# Altium PCB COIL-BOOST-10A.PcbDoc (part 3 of 5)
Units mm, origin at the board's own origin, x right, y up, seen from the top; angles counter-clockwise.
Board outline 80.1 x 100.1 mm, 4 copper layers (L1, L2, L3, L4), stack 1.512 mm thick; 282 components, 151 nets, 786 pads, 740 vias.
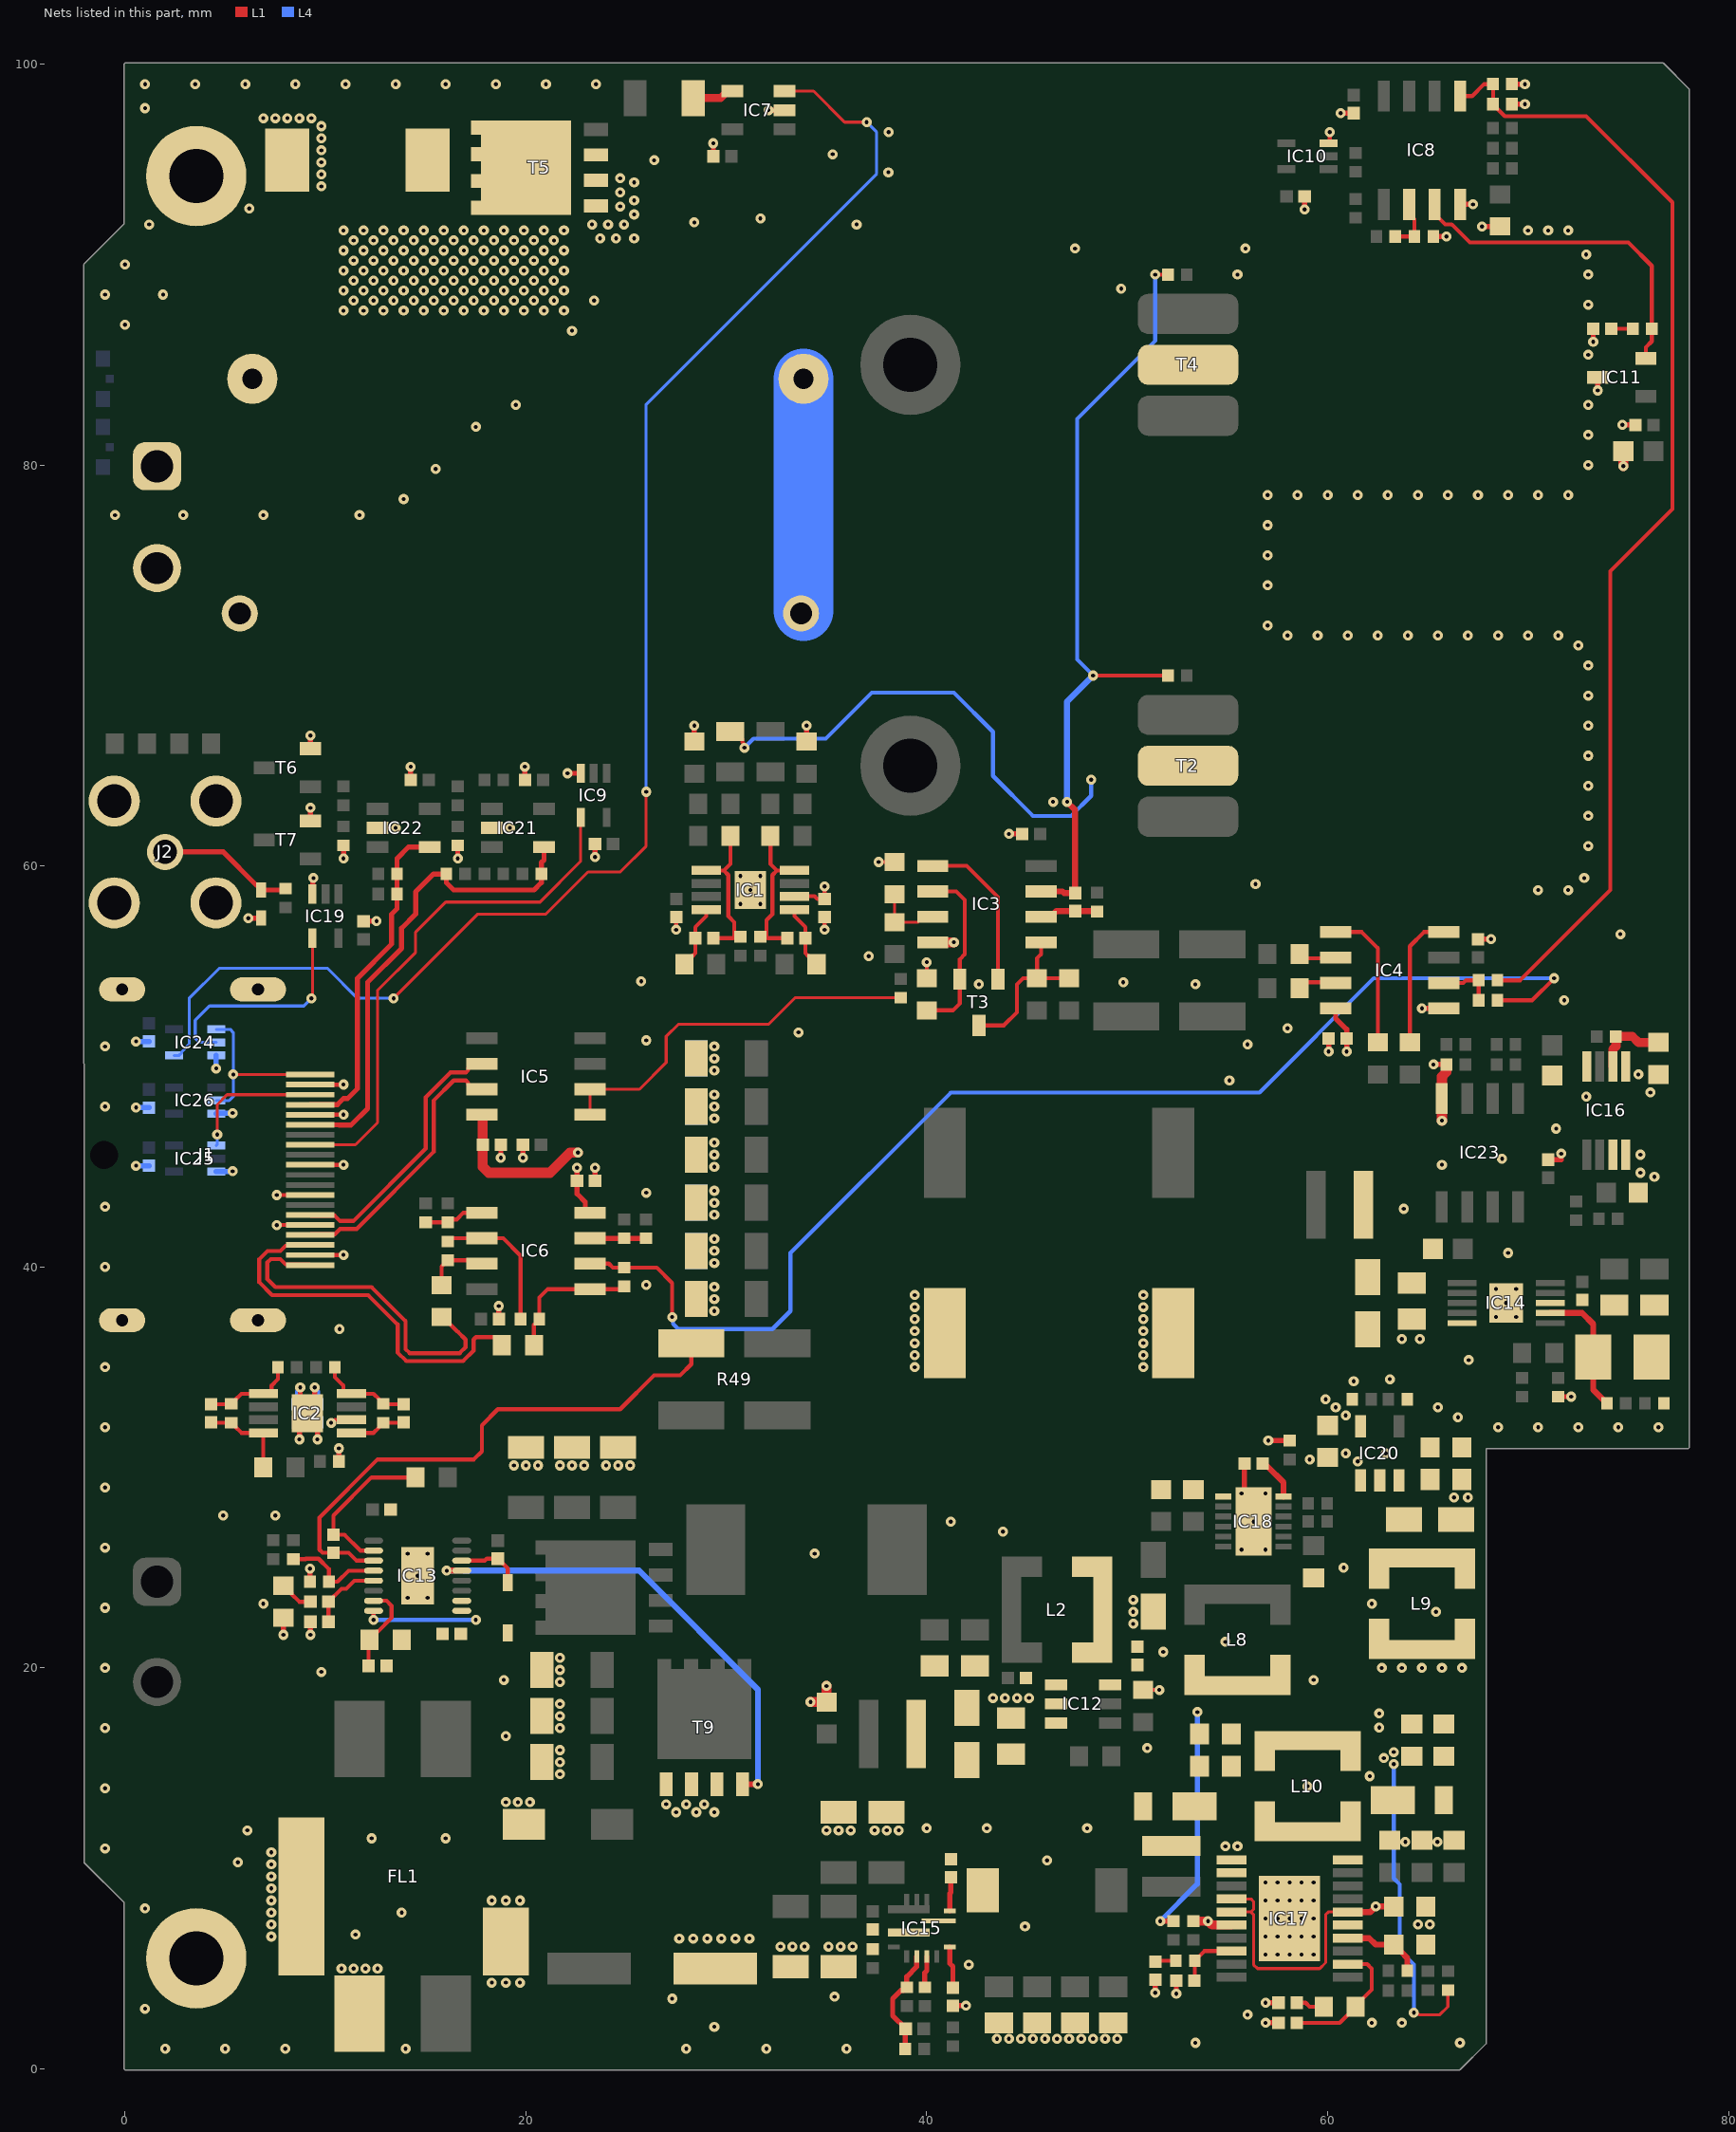
[diagram p4: the nets of this part, all layers, seen from the top]

## Part data (continued)
C78: library part CC0402_27PF_50V_5%_C0G, "Non-polarised capacitor", Case=0402, Manufacturer=GENERIC, Manufacturer1 ComponentHeight=0.55mm, Manufacturer1 Example=KEMET, Manufacturer1 Part Number=C0402C270J5GACTU, Tolerance=±5%, Voltage=50V, Author="CERN DEM JLC", Component Type=Standard, CreateDate=10/25/2012, HelpURL="\\cern.ch\dfs\Applications\Altium\Datasheets\CC0402_C0G_KEMET_(Commercial Grade).pdf", LatestRevisionDate=4/22/2015, Manufacturer Part Number=CC0402_27PF_50V_5%_C0G, Mounted=Yes, Part Description="SMD Multilayer Chip Ceramic Capacitor", Part Number=CC0402_27PF_50V_5%_C0G, Pin Count=2, Sense=No, SMD=Yes, Socket=No, Status=Preferred, TC=C0G/NP0
C79: library part CC0402_47PF_50V_5%_C0G, "Non-polarised capacitor", Case=0402, Manufacturer=GENERIC, Manufacturer1 ComponentHeight=0.55mm, Manufacturer1 Example=KEMET, Manufacturer1 Part Number=C0402C470J5GACTU, Tolerance=±5%, Voltage=50V, Author="CERN DEM JLC", Component Type=Standard, CreateDate=12/3/2007, HelpURL="\\cern.ch\dfs\Applications\Altium\Datasheets\CC0402_C0G_KEMET_(Commercial Grade).pdf", LatestRevisionDate=4/22/2015, Manufacturer Part Number=CC0402_47PF_50V_5%_C0G, Mounted=Yes, Part Description="SMD Multilayer Chip Ceramic Capacitor", Part Number=CC0402_47PF_50V_5%_C0G, Pin Count=2, Sense=No, SMD=Yes, Socket=No, Status=Preferred, TC=C0G/NP0
C80: library part CC0402_470PF_50V_10%_X7R, "Non-polarised capacitor", Case=0402, Manufacturer=GENERIC, Manufacturer1 ComponentHeight=0.55mm, Manufacturer1 Example=PHYCOMP, Manufacturer1 Part Number=223858715618, Tolerance=±10%, Voltage=50V, Author="CERN DEM JLC", Component Type=Standard, CreateDate=12/3/2007, HelpURL=\\cern.ch\dfs\Applications\Altium\Datasheets\CC0402_NP0_PHYCOMP.pdf, LatestRevisionDate=12/3/2007, Manufacturer Part Number=CC0402_470PF_50V_10%_X7R, Mounted=Yes, Part Description="SMD Multilayer Chip Ceramic Capacitor", Part Number=CC0402_470PF_50V_10%_X7R, Pin Count=2, Sense=No, SMD=Yes, Socket=No, Status="Not Recommended", TC=X7R
C81: library part CC0402_15NF_50V_5%_X7R, "Non-polarised capacitor", Case=0402, Manufacturer=GENERIC, Manufacturer1 ComponentHeight=0.55mm, Manufacturer1 Example=KEMET, Manufacturer1 Part Number=C0402C153J5RACTU, Tolerance=±5%, Voltage=50V, Author="CERN DEM BC", Component Type=Standard, CreateDate=9/2/2019, HelpURL=\\cern.ch\dfs\Applications\Altium\Datasheets\CC0402_X7R_KEMET.pdf, LatestRevisionDate=9/2/2019, Manufacturer Part Number=CC0402_15NF_50V_5%_X7R, Mounted=Yes, Part Description="SMD Multilayer Chip Ceramic Capacitor", Part Number=CC0402_15NF_50V_5%_X7R, Pin Count=2, Sense=No, SMD=Yes, Socket=No, Status=Preferred, TC=X7R
C82: library part CC0402_10NF_50V_5%_X7R, "Non-polarised capacitor", Case=0402, Manufacturer=GENERIC, Manufacturer1 ComponentHeight=0.55mm, Manufacturer1 Example=KEMET, Manufacturer1 Part Number=C0402C103J5RAC, Tolerance=±5%, Voltage=50V, Author="CERN DEM BC", Component Type=Standard, CreateDate=7/15/2020, HelpURL=\\cern.ch\dfs\Applications\Altium\Datasheets\CC0402_X7R_KEMET.pdf, LatestRevisionDate=7/15/2020, Manufacturer Part Number=CC0402_10NF_50V_5%_X7R, Mounted=Yes, Part Description="SMD Multilayer Chip Ceramic Capacitor", Part Number=CC0402_10NF_50V_5%_X7R, Pin Count=2, Sense=No, SMD=Yes, Socket=No, Status=Preferred, TC=X7R
D1: "Transient Voltage Suppressor Diode (Uni-Directional)", Case=DO-214AB, Manufacturer=LITTELFUSE, Power=1500W, Voltage=150V, Author="CERN DEM BC", Bonding=No, Component Type=Standard, ComponentHeight=2.62mm, CreateDate=11/2/2015, Device=SMCJ150A, HelpURL=\\cern.ch\dfs\Applications\Altium\Datasheets\SMCJ.pdf, LatestRevisionDate=11/2/2015, Manufacturer Part Number=SMCJ150A, Mounted=Yes, PackageDescription="DO-214-AB/SMC Molded Diode, Body 7.9x5.9mm, IPC Medium Density", Part Description="Uni-Directional Transient Voltage Suppressor Diode", Part Number=SMCJ150A, Pin Count=2, PressFit=No, Sense=No, SMD=Yes, Socket=No
D2: "Schottky Diode", Case=SOD-323, Manufacturer="ON SEMICONDUCTOR", Manufacturer Part Number=BAT54H, Power=200mA, Voltage=30V, Author="CERN DEM BC", Bonding=No, Component Type=Standard, ComponentHeight=1mm, CreateDate=9/30/2019, Device=BAT54HT1G, HelpURL=\\cern.ch\dfs\Applications\Altium\Datasheets\BAT54HT1G.pdf, LatestRevisionDate=5/24/2022, Mounted=Yes, PackageDescription="SOD-323 Diode; 1.70mm W X 1.25mm L X 1.00mm H Body, IPC Medium Density", Part Description="30V Silicon Hot-Carrier Detector and Switching Diode", Part Number=BAT54HT1G, Pin Count=2, PressFit=No, Sense=No, SMD=Yes, Socket=No
D3 D4: "Diode", Manufacturer="DIODES INCORPORATED", Power=1A, Voltage=100V, Author="CERN DEM HF", Bonding=No, Component Type=Standard, ComponentHeight=1mm, CreateDate=3/28/2024, Device=DFLS1100-7, HelpURL=\\cern.ch\dfs\Applications\Altium\Datasheets\DFLS1100-7.pdf, LatestRevisionDate=3/28/2024, Manufacturer Part Number=DFLS1100-7, Mounted=Yes, PackageDescription="SODFL Diode; 2.8mm W X 1.78mm L X mm H Body, POWERDI®123 Case", Part Description="High Voltage Schttky Barrier Rectifier", Part Number=DFLS1100-7, Pin Count=2, PressFit=No, Sense=No, SMD=Yes, Socket=No
D5: "Zener Diode", Case=DO-214AC, Manufacturer="VISHAY SEMICONDUCTORS", Power=1.25W, Voltage=27V, Author="CERN DEM JLC", Bonding=No, Component Type=Standard, ComponentHeight=2.3mm, CreateDate=6/2/2008, Device=BZG03C27, HelpURL=\\cern.ch\dfs\Applications\Altium\Datasheets\BZG03C.pdf, LatestRevisionDate=6/2/2008, Manufacturer Part Number=BZG03C27, Mounted=Yes, PackageDescription="DO-214-AC/SMA Molded Diode, Body 5.3x2.6mm, IPC Medium Density", Part Description="Voltage Regulator Diode", Part Number=BZG03C27, Pin Count=2, PressFit=No, Sense=No, SMD=Yes, Socket=No
D6: "ESD protection diode", Case=SOD523, Manufacturer="NXP SEMICONDUCTORS", Power=330W, Voltage=3V3, Author="CERN DEM JLC", Bonding=No, Component Type=Standard, ComponentHeight=0.65mm, CreateDate=11/29/2012, Device=PESD3V3S1UB, HelpURL=\\cern.ch\dfs\Applications\Altium\Datasheets\PESD3V3S1UB.pdf, LatestRevisionDate=11/29/2012, Manufacturer Part Number=PESD3V3S1UB, Mounted=Yes, PackageDescription="Ultra Small Outline Diode Flat Lead (SOD-523), Body; 1.2mm L X 0.8mm W X 0.65mm H, IPC Medium Density", Part Description="ESD protection diode (23kV)", Part Number=PESD3V3S1UB, Pin Count=2, PressFit=No, Sense=No, SMD=Yes, Socket=No
FL1: library part FIL_MURATA_BNX022-01L, "Block Type EMIFIL (LC Combined)", Manufacturer1=MURATA, Manufacturer1 Part Number=BNX022-01L, Resistance=0.5R, Author="CERN DEM JLC", Component Type=Standard, ComponentHeight=3.3mm, CreateDate=10.10.2012, HelpURL=\\cern.ch\dfs\Applications\Altium\Datasheets\FIL_MURATA_BNX022-01L.pdf, LatestRevisionDate=10.10.2012, Mounted=Yes, Part Description="Block Type EMIFIL (LC Combined) SMD Type, BNX02* Series", Part Number=FIL_MURATA_BNX022-01L, Pin Count=2, Sense=No, SMD=Yes, Socket=No, Status=None
IC1 IC2: "Differential Amplifier", Case=MSOP8, Manufacturer="TEXAS INSTRUMENTS", Author="CERN DEM JLC", Bonding=No, Component Type=Standard, ComponentHeight=1.1mm, CreateDate=12/17/2013, Device=OPA1632DGN, HelpURL=\\cern.ch\dfs\Applications\Altium\Datasheets\OPA1632DGN.pdf, LatestRevisionDate=12/17/2013, Manufacturer Part Number=OPA1632DGN, Mounted=Yes, PackageDescription="SOP, 0.65mm Pitch; 8 Pin, 3.00mm W X 3.00mm L X 1.10mm H body (w/Thermal Tab 1.57 X 1.89 mm), IPC Medium Density", Part Description="High-Performance, Fully-Differential Audio Operational Amplifier", Part Number=OPA1632DGN, Pin Count=9, PressFit=No, Sense=No, SMD=Yes, Socket=No
IC3 IC6 IC23: "Dual Operational Amplifier", Case=SOIC8, Manufacturer="TEXAS INSTRUMENTS", Author="CERN DEM MR", Bonding=No, Component Type=Standard, ComponentHeight=1.75mm, CreateDate=8/7/2019, Device=OPA2197ID, HelpURL=\\cern.ch\dfs\Applications\Altium\Datasheets\OPA2197ID.pdf, LatestRevisionDate=8/7/2019, Manufacturer Part Number=OPA2197ID, Mounted=Yes, PackageDescription="SOIC 8, Pitch 1.27mm - Body 4x5mm, IPC Medium Density", Part Description="Dual, 36-V, Precision, Rail-to-Rail Input/Output, Low Offset Voltage, Operational Amplifiers", Part Number=OPA2197ID, Pin Count=8, PressFit=No, Sense=No, SMD=Yes, Socket=No
IC4: "Low Cost Low Power Instrumentation Amplifier", Case=SOIC8, Manufacturer1="ANALOG DEVICES", Manufacturer1 Part Number=AD620ARZ-REEL7, Author="CERN DEM JLC", Bonding=No, Component Type=Standard, ComponentHeight=1.75mm, CreateDate=13.02.2017, Device=AD620ARZ, HelpURL=\\cern.ch\dfs\Applications\Altium\Datasheets\AD620ARZ.pdf, LatestRevisionDate=29.03.2022, Mounted=Yes, PackageDescription="SOIC 8, Pitch 1.27mm - Body 4x5mm, IPC Medium Density", Part Description="Low Cost Low Power Instrumentation Amplifier", Part Number=AD620ARZ, Pin Count=8, PressFit=No, Sense=No, SMD=Yes, Socket=No
IC5: "IC OPAMP DIFF 1 CIRCUIT 8SOIC Differential Amplifier 1 Circuit 8-SOIC", Case/Package=SOIC, Dual Supply Voltage=15V, Input Offset Voltage (Vos)=100µV, Manufacturer="Texas Instruments", Manufacturer Lifecycle Status=ACTIVE, Max Dual Supply Voltage=18V, Max Operating Temperature=85°C, Min Dual Supply Voltage=4V, Min Operating Temperature=-40°C, Min Supply Voltage=8V, Nominal Supply Current=2.4mA, Output Current per Channel=60mA, Supplier Part Number=INA157UA-ND, Voltage Gain=6.02dB, -3db Bandwidth=4MHz, Category="Amplifiers - Op Amps, Buffer, Instrumentation", Common Mode Rejection Ratio=80dB, ComponentLink1Description=https://sigma.octopart.com:443/49249642/technical_drawing/Texas-Instruments-INA157UA.pdf?src-supplier=Texas+Instruments, ComponentLink1URL=https://sigma.octopart.com:443/49249642/technical_drawing/Texas-Instruments-INA157UA.pdf?src-supplier=Texas+Instruments, ComponentLink2Description=https://octopart.com:443/opatz8j6/c1?t=U1EGlDNQZqLQs-EwIsscqEEx-AfnVOllSlN4p0sh4PLdG1CcVMKRtmhTNlN5f_Uh_vUGKP152rEL5GLEXC8DNZuiG5tbL9tPH-teoooIFRknLMdlw0_Jv4zBSHnT4PvLcvwFqHgDMUmN8-CU-c3UHujaNllWAgd-PDXByNTyJSuUkuVnwLSvEPkd0Q_esnRAQitWnREmUgqmclHl2b6W6tCFcyWDuRzDd4IkS-8MZ59sgpEPanuaKX1qGjiQLPbd3OG0klFAyskjpNKaHTZEnEYEGL77h_GEymF0r_g3ACZDzpib4ELj8IvhiwXeMcRieELbSgYPCbUTcjZO1RvHbL2-kGPWqPzznfkJGrgq9ClaUaTRrtnm5Mq_6ye76DY4o9A&src-supplier=Texas+Instruments, ComponentLink2URL=https://octopart.com:443/opatz8j6/c1?t=U1EGlDNQZqLQs-EwIsscqEEx-AfnVOllSlN4p0sh4PLdG1CcVMKRtmhTNlN5f_Uh_vUGKP152rEL5GLEXC8DNZuiG5tbL9tPH-teoooIFRknLMdlw0_Jv4zBSHnT4PvLcvwFqHgDMUmN8-CU-c3UHujaNllWAgd-PDXByNTyJSuUkuVnwLSvEPkd0Q_esnRAQitWnREmUgqmclHl2b6W6tCFcyWDuRzDd4IkS-8MZ59sgpEPanuaKX1qGjiQLPbd3OG0klFAyskjpNKaHTZEnEYEGL77h_GEymF0r_g3ACZDzpib4ELj8IvhiwXeMcRieELbSgYPCbUTcjZO1RvHbL2-kGPWqPzznfkJGrgq9ClaUaTRrtnm5Mq_6ye76DY4o9A&src-supplier=Texas+Instruments, ComponentLink3Description=https://datasheet.octopart.com:443/INA157UA-Texas-Instruments-datasheet-152917.pdf?src-supplier=Texas+Instruments, ComponentLink3URL=https://datasheet.octopart.com:443/INA157UA-Texas-Instruments-datasheet-152917.pdf?src-supplier=Texas+Instruments, ComponentLink4Description=https://datasheet.octopart.com:443/INA157UA-Texas-Instruments-datasheet-10257352.pdf?src-supplier=element14+APAC, ComponentLink4URL=https://datasheet.octopart.com:443/INA157UA-Texas-Instruments-datasheet-10257352.pdf?src-supplier=element14+APAC, ComponentLink5Description=https://datasheet.octopart.com:443/INA157UA-Texas-Instruments-datasheet-30905.pdf?src-supplier=DigiKey, ComponentLink5URL=https://datasheet.octopart.com:443/INA157UA-Texas-Instruments-datasheet-30905.pdf?src-supplier=DigiKey, ComponentLink6Description=https://datasheet.octopart.com:443/INA157UA-Texas-Instruments-datasheet-14140569.pdf?src-supplier=iiiC, ComponentLink6URL=https://datasheet.octopart.com:443/INA157UA-Texas-Instruments-datasheet-14140569.pdf?src-supplier=iiiC, ComponentLink7Description=https://datasheet.octopart.com:443/INA157UA-Texas-Instruments-datasheet-8443426.pdf?src-supplier=Jameco, ComponentLink7URL=https://datasheet.octopart.com:443/INA157UA-Texas-Instruments-datasheet-8443426.pdf?src-supplier=Jameco, ComponentLink8Description=http://sigma.octopart.com:80/reach_statement/Texas-Instruments-company-64.pdf?src-supplier=Compliance+Statements, ComponentLink8URL=http://sigma.octopart.com:80/reach_statement/Texas-Instruments-company-64.pdf?src-supplier=Compliance+Statements, ComponentLink9Description=http://sigma.octopart.com:80/conflict_mineral_statement/Texas-Instruments-company-63.pdf?src-supplier=Compliance+Statements, ComponentLink9URL=http://sigma.octopart.com:80/conflict_mineral_statement/Texas-Instruments-company-63.pdf?src-supplier=Compliance+Statements, Gain Bandwidth Product=3MHz, Height=1.75mm, Lead Free="Lead Free", Length=4.9mm, Lifecycle Status=Production, Manufacturer Part Number=INA157UA, Max Supply Voltage=18V, Min Input Voltage=4V, Number of Amplifiers=1, Number of Channels=2, Number of Circuits=1, Number of Elements=1, Operating Supply Current=2.4mA, Pins=8, Pricing="1=3.99, 10=3.019, 75=2.55467, 150=2.44673, 300=2.35783, 525=2.2977, 1050=2.23519, 2550=2.17103 (USD)", Quiescent Current=2.4mA, Radiation Hardening=No, REACH SVHC=No, RoHS=Compliant, Settling Time=2ns, Slew Rate=14V/µs, Stock=608, Supplier=DigiKey, Thickness=1.58mm, Weight=75.891673mg, Width=3.91mm
IC7: "Single-Channel High-Speed Low-Side Gate Driver With Negative Input  Voltage Capability", Case=SOT23-5, Manufacturer="TEXAS INSTRUMENTS", Manufacturer Part Number=UCC27519AQDBV, Author="CERN DEM JLC", Bonding=No, Component Type=Standard, ComponentHeight=1.45mm, CreateDate=7/16/2018, Device=UCC27519AQDBVRQ1, HelpURL=\\cern.ch\dfs\Applications\Altium\Datasheets\UCC27519AQDBVRQ1.pdf, LatestRevisionDate=6/13/2022, Mounted=Yes, PackageDescription="SOT, 0.95mm Pitch; 5 pin, 1.60mm W X 2.90mm L X 1.45mm H body, IPC Medium Density", Part Description="Single-Channel High-Speed Low-Side Gate Driver with Negative Input  Voltage Capability", Part Number=UCC27519AQDBVRQ1, Pin Count=5, PressFit=No, Sense=No, SMD=Yes, Socket=No
IC8: "Dual Operational Amplifier", Case=SOIC8, Manufacturer="NATIONAL SEMICONDUCTOR", Manufacturer Part Number=LM393M, Author="CERN DEM JLC", Bonding=No, Component Type=Standard, ComponentHeight=1.75mm, CreateDate=11/18/2011, Device=LM393M/NOPB, HelpURL=\\cern.ch\dfs\Applications\Altium\Datasheets\LM393M-NOPB.pdf, LatestRevisionDate=6/2/2022, Mounted=Yes, PackageDescription="SOIC 8, Pitch 1.27mm - Body 4x5mm, IPC Medium Density", Part Description="Low Power Low Offset Voltage Dual Comparators", Part Number=LM393M/NOPB, Pin Count=8, PressFit=No, Sense=No, SMD=Yes, Socket=No
IC9 IC19: "Single Schmitt-Trigger Buffer", Case=SOT353, Manufacturer="TEXAS INSTRUMENTS", Author="CERN DEM HF", Bonding=No, Component Type=Standard, ComponentHeight=1.45mm, CreateDate=05.12.2024, Device=SN74LVC1G17DCK, HelpURL=\\cern.ch\dfs\Applications\Altium\Datasheets\SN74LVC1G17.pdf, LatestRevisionDate=05.12.2024, Manufacturer Part Number=SN74LVC1G17DCK, Mounted=Yes, PackageDescription="SOT353, SC70-5, 0.65mm Pitch; 5 Pin, 1.25mm W X 2.00mm L X 1.10mm H body, IPC Medium Density", Part Description="Single Schmitt-Trigger Buffer", Part Number=SN74LVC1G17DCK, Pin Count=5, PressFit=No, Sense=No, SMD=Yes, Socket=No
IC10 IC24: "Single 2-Input Positive-OR Gate", Case=SOT353, Manufacturer="NXP SEMICONDUCTORS", Author="CERN DEM JLC", Bonding=No, Component Type=Standard, ComponentHeight=1.1mm, CreateDate=11/25/2013, Device=74LVC1G32GW, HelpURL=\\cern.ch\dfs\Applications\Altium\Datasheets\74LVC1G32GW.pdf, LatestRevisionDate=11/25/2013, Manufacturer Part Number=74LVC1G32GW, Mounted=Yes, PackageDescription="SOT353, SC70-5, 0.65mm Pitch; 5 Pin, 1.25mm W X 2.05mm L X 1.10mm H body, IPC Medium Density", Part Description="Single 2-input OR gate", Part Number=74LVC1G32GW, Pin Count=5, PressFit=No, Sense=No, SMD=Yes, Socket=No
IC11: "-20° to +100°C ±3°C Precision Centigrade Temperature Sensors", Case=SOT23, Manufacturer="TEXAS INSTRUMENTS", Author="CERN DEM JLC", Bonding=No, Component Type=Standard, ComponentHeight=1.12mm, CreateDate=19/01/2011, Device=LM45CIM3/NOPB, HelpURL=\\cern.ch\dfs\Applications\Altium\Datasheets\LM45CIM3-NOPB.pdf, LatestRevisionDate=19/01/2011, Manufacturer Part Number=LM45CIM3/NOPB, Mounted=Yes, PackageDescription="SOT, 0.95mm Pitch; 3 Pin, 1.30mm W X 2.92mm L X 1.12mm H body, IPC Medium Density", Part Description="-20° to +100°C ±3°C Precision Centigrade Temperature Sensors", Part Number=LM45CIM3/NOPB, Pin Count=3, PressFit=No, Sense=No, SMD=Yes, Socket=No
IC12: "4.2V TO 18V INPUT, 2A LOW IQ SYNCHRONOUS BUCK CONVERTER", Case=SOT23-6, Manufacturer1="DIODES INCORPORATED", Author="CERN DEM HF", Bonding=No, Component Type=Standard, ComponentHeight=1.1mm, CreateDate=07.01.2022, Device=AP62201WU-7, HelpURL=\\cern.ch\dfs\Applications\Altium\Datasheets\AP6220x.pdf, LatestRevisionDate=07.01.2022, Manufacturer1 Part Number=AP62201WU-7, Mounted=Yes, PackageDescription="SOT23, 0.95mm Pitch; 6 Pin, 1.625mm W X 2.90mm L X 1.00mm H body, IPC Medium Density", Part Description="4.2V TO 18V INPUT, 2A LOW IQ SYNCHRONOUS BUCK CONVERTER", Part Number=AP62201WU-7, Pin Count=6, PressFit=No, Sense=No, SMD=Yes, Socket=No
IC13: "Switching Controller, Current-mode, 3000kHz Switching Freq-Max, CMOS, PDSO16", Manufacturer="Analog Devices", Manufacturer Lifecycle Status=PRODUCTION, Max Junction Temperature (Tj)=125°C, Max Operating Temperature=150°C, Max Supply Voltage=40V, Min Operating Temperature=-40°C, Min Supply Voltage=4.5V, Supplier Part Number=505-LTC7803JMSE#PBF-ND, Category="Voltage Regulators - Switching", ComponentLink1Description=https://octopart.com:443/opatz8j6/c1?t=5dw9Nd2OWeROQ8jzeKgBZlBD8kskVTdrwPZX-5mU-B2RRZeC48lCkNxp9j4ai_AdbR1nu6RwUuf-HWXD6lvKoTW95MTcGdg3BwQvLHZkN_jGlBenPbn6XziIUWwoJvDwBBFwQ_nVwer2Sl7PDtDKubsV7BlTlGyJBgUk2V_gNZKzPNSODIlH5TWRPknxJfZbv-ilI4hJ8wnpkoROzlklVL0Xb708klc6dGNj-DoH2d3O_6AejvWWD2O0ke98dZJqgcVpAnnNJZD6ymU9AsE6DSRT8dmiL-VdB9m4wCgAO4W8Pq0JTQDGVBo&src-supplier=Analog+Devices, ComponentLink1URL=https://octopart.com:443/opatz8j6/c1?t=5dw9Nd2OWeROQ8jzeKgBZlBD8kskVTdrwPZX-5mU-B2RRZeC48lCkNxp9j4ai_AdbR1nu6RwUuf-HWXD6lvKoTW95MTcGdg3BwQvLHZkN_jGlBenPbn6XziIUWwoJvDwBBFwQ_nVwer2Sl7PDtDKubsV7BlTlGyJBgUk2V_gNZKzPNSODIlH5TWRPknxJfZbv-ilI4hJ8wnpkoROzlklVL0Xb708klc6dGNj-DoH2d3O_6AejvWWD2O0ke98dZJqgcVpAnnNJZD6ymU9AsE6DSRT8dmiL-VdB9m4wCgAO4W8Pq0JTQDGVBo&src-supplier=Analog+Devices, ComponentLink2Description=https://datasheet.octopart.com:443/LTC7803JMSE%23PBF-Analog-Devices-datasheet-159582621.pdf?src-supplier=Upverter, ComponentLink2URL=https://datasheet.octopart.com:443/LTC7803JMSE%23PBF-Analog-Devices-datasheet-159582621.pdf?src-supplier=Upverter, ComponentLink3Description=https://sigma.octopart.com:443/57695880/technical_drawing/Analog-Devices-LTC7803JMSE%23PBF.pdf?src-supplier=Upverter, ComponentLink3URL=https://sigma.octopart.com:443/57695880/technical_drawing/Analog-Devices-LTC7803JMSE%23PBF.pdf?src-supplier=Upverter, ComponentLink4Description=http://sigma.octopart.com:80/conflict_mineral_statement/Analog-Devices-company-33.pdf?src-supplier=Compliance+Statements, ComponentLink4URL=http://sigma.octopart.com:80/conflict_mineral_statement/Analog-Devices-company-33.pdf?src-supplier=Compliance+Statements, ComponentLink5Description=https://octopart.com:443/opatz8j6/c1?t=no1BqtriEBH1NAd4zkHFVkhWle8BNgCeIA75cLUhtUewtzisG14v01SD186wbqu5myay8KNpevgdiyToXGRDKJ2VV3Gw_xhRrfcIB2b0v6Jd_LvssVu6Z2cBACa7Sm1dve-TVh1iNHQsaKG7SkEiMSD9uLObpKocMQGC_AYZVt-QMlpr3vHVwcLx9Xb9IdrLjsi8cba3VOuMaTpnYAUwywv8cGMHJjCDsEpDKa8mXiBxHEx7ZoNhlqHlSrsMglcIvOwIFAPVqy19bX1AhXRU-3-apvXypx2KrGalTQzww-SoICLU0VIAAx0&src-supplier=Compliance+Statements, ComponentLink5URL=https://octopart.com:443/opatz8j6/c1?t=no1BqtriEBH1NAd4zkHFVkhWle8BNgCeIA75cLUhtUewtzisG14v01SD186wbqu5myay8KNpevgdiyToXGRDKJ2VV3Gw_xhRrfcIB2b0v6Jd_LvssVu6Z2cBACa7Sm1dve-TVh1iNHQsaKG7SkEiMSD9uLObpKocMQGC_AYZVt-QMlpr3vHVwcLx9Xb9IdrLjsi8cba3VOuMaTpnYAUwywv8cGMHJjCDsEpDKa8mXiBxHEx7ZoNhlqHlSrsMglcIvOwIFAPVqy19bX1AhXRU-3-apvXypx2KrGalTQzww-SoICLU0VIAAx0&src-supplier=Compliance+Statements, Height=1.1mm, Lifecycle Status=Production, Manufacturer Part Number=LTC7803JMSE#PBF, Max Duty Cycle=100%, Number of Outputs=1, Pins=16, Pricing="1=6.65, 10=5.117, 37=4.59811, 111=4.2873, 259=4.10517, 518=3.98531, 1036=3.88665, 2516=3.78541 (USD)", RoHS=Compliant, Stock=185, Supplier=DigiKey, Topology=Buck
IC14: "20V, 200mA, Ultralow Noise, Ultrahigh PSRR RF Linear Regulator", Case=MSOP10, Manufacturer1="LINEAR TECHNOLOGY", Author="CERN DEM MR", Bonding=No, Component Type=Standard, ComponentHeight=1.1mm, CreateDate=09.06.2016, Device=LT3042EMSE#PBF, HelpURL=\\cern.ch\dfs\Applications\Altium\Datasheets\LT3042EMSE#PBF.pdf, LatestRevisionDate=09.06.2016, Manufacturer1 Part Number=LT3042EMSE#PBF, Mounted=Yes, PackageDescription="SOP, 0.50mm, Pitch; 10 pin, 3.00mm W X 3.00mm L X 1.10mm H body (w/thermal tab  1.68 X 1.98 mm), IPC Medium Density", Part Description="20V, 200mA, Ultralow Noise, Ultrahigh PSRR RF Linear Regulator", Part Number=LT3042EMSE#PBF, Pin Count=11, PressFit=No, Sense=No, SMD=Yes, Socket=No
IC15: "TPS5683x 4.5V to 28V Input, 8A Synchronous Buck Converter", Arena Part Number=150-000054, Case=VQFN, Manufacturer="Texas Instruments", Author="Michal Beldyga", Component Type=Standard, CreateDate=1/24/2025, Device=TPS56838RPAR, LastRevision=4/15/2025, Manufacturer Part Number=TPS56838RPAR, PackageDescription="VQFN-HR - 1 mm max height 10-Pin", Part Description="TPS5683x 4.5V to 28V Input, 8A Synchronous Buck Converter", Part Number=TPS56838RPAR, Pin Count=10, Status=Active
IC16: "0.25ppm Noise, Low Drift Precision Buffered Voltage Reference", Case=SSOP8, Manufacturer1="LINEAR TECHNOLOGY", Author="CERN DEM JLC", Bonding=No, Component Type=Standard, ComponentHeight=1.1mm, CreateDate=07.06.2012, Device=LTC6655BHMS8-5#PBF, HelpURL=\\cern.ch\dfs\Applications\Altium\Datasheets\LTC6655BHMS8-5#PBF.pdf, LatestRevisionDate=07.06.2012, Manufacturer1 Part Number=LTC6655BHMS8-5#PBF, Mounted=Yes, PackageDescription="SOP, 8-Leads, Body 3.1x3.1mm (max), Pitch 0.65mm, IPC Medium Density", Part Description="5V, 0.25ppm Noise, Low Drift Precision Buffered Voltage Reference", Part Number=LTC6655BHMS8-5#PBF, Pin Count=8, PressFit=No, Sense=No, SMD=Yes, Socket=No
IC17: "1A/0.6A, DC-to-DC Switching Regulator with Independent Positive and Negative Outputs", Case=SSOP20, Manufacturer="ANALOG DEVICES", Manufacturer Part Number=ADP5070ARE, Author="CERN DEM JLC", Bonding=No, Component Type=Standard, ComponentHeight=1.2mm, CreateDate=6/21/2017, Device=ADP5070AREZ, HelpURL=\\cern.ch\dfs\Applications\Altium\Datasheets\ADP5070AREZ.pdf, LatestRevisionDate=4/1/2022, Mounted=Yes, PackageDescription="SOP, 0.65mm Pitch; 20 Pin, 4.40mm W X 6.50mm L X 1.20mm H Body (w/Thermal Tab 3.05mm X 4.25mm), IPC Medium Density", Part Description="1A/0.6A, DC-to-DC Switching Regulator with Independent Positive and Negative Outputs", Part Number=ADP5070AREZ, Pin Count=20, PressFit=No, Sense=No, SMD=Yes, Socket=No
IC18: "1.22V to 20V 500mA, Low Noise, LDO Adjustable Micropower Regulator", Case=SON12, Manufacturer="LINEAR TECHNOLOGY", Author="CERN DEM HF", Bonding=No, Component Type=Standard, ComponentHeight=0.8mm, CreateDate=4/25/2023, Device=LT1763CDE, HelpURL=\\cern.ch\dfs\Applications\Altium\Datasheets\LT1763.pdf, LatestRevisionDate=4/25/2023, Manufacturer Part Number=LT1763CDE, Mounted=Yes, PackageDescription="SON, (DFN) 0.50mm Pitch; 12 Pin, 3.00mm W X 4.00mm L X 0.80mm H body (w/Thermal Tab 1.80 X 3.40mm), IPC Medium Density", Part Description="1.22V to 20V, 500mA, Low Noise, LDO Adjustable Micropower Regulator", Part Number=LT1763CDE, Pin Count=13, PressFit=No, Sense=No, SMD=Yes, Socket=No
IC20: "200mA, Low Noise, Low Dropout Negative Micropower Regulator", Case=SOT23-5, Manufacturer="LINEAR TECHNOLOGY", Author="CERN DEM JLC", Bonding=No, Component Type=Standard, ComponentHeight=1mm, CreateDate=05.05.2009, Device=LT1964ES5-SD#TRMPBF, HelpURL=\\cern.ch\dfs\Applications\Altium\Datasheets\LT1964ES5-SD#TRMPBF.pdf, LatestRevisionDate=05.05.2009, Manufacturer Part Number=LT1964ES5-SD#TRMPBF, Mounted=Yes, PackageDescription="SOT23, 0.95mm pitch; 5 pin, 1.75mm W X 3.00mm L, IPC Medium Density", Part Description="-1.22V to -20V, 200mA, Low Noise, Low Dropout Negative Micropower Regulator", Part Number=LT1964ES5-SD#TRMPBF, Pin Count=5, PressFit=No, Sense=No, SMD=Yes, Socket=No
IC21 IC22: library part LM321MF/NOPB, "Low Power Single Operational Amplifier", Case=SOT23-5, Manufacturer="TEXAS INSTRUMENTS", Author="CERN DEM BC", Bonding=No, Component Type=Standard, ComponentHeight=1.45mm, CreateDate=9/4/2015, Device=LM321MF, HelpURL=\\cern.ch\dfs\Applications\Altium\Datasheets\LM321MF-NOPB.pdf, LatestRevisionDate=6/1/2022, Manufacturer Part Number=LM321MF, Mounted=Yes, PackageDescription="SOT, 0.95mm Pitch; 5 Pin, 1.60mm W X 2.90mm L X 1.45mm H body, IPC Medium Density", Part Description="Low Power Single Operational Amplifier", Part Number=LM321MF/NOPB, Pin Count=5, PressFit=No, Sense=No, SMD=Yes, Socket=No
IC25: "Single 2-Input AND Gate", Case=SOT353, Manufacturer="NXP SEMICONDUCTORS", Author="CERN DEM JLC", Bonding=No, Component Type=Standard, ComponentHeight=1.1mm, CreateDate=8/31/2010, Device=74AHC1G08GW, HelpURL=\\cern.ch\dfs\Applications\Altium\Datasheets\74AHC1G08GW.pdf, LatestRevisionDate=8/31/2010, Manufacturer Part Number=74AHC1G08GW, Mounted=Yes, PackageDescription="SOT353, SC70-5, 0.65mm Pitch; 5 Pin, 1.25mm W X 2.05mm L X 1.10mm H body, IPC Medium Density", Part Description="Single 2-Input AND Gate", Part Number=74AHC1G08GW, Pin Count=5, PressFit=No, Sense=No, SMD=Yes, Socket=No
IC26: "Single Schmitt-Trigger Inverter", Case=SOT353, Manufacturer="NXP SEMICONDUCTORS", Author="CERN DEM JMW", Bonding=No, Component Type=Standard, ComponentHeight=1.1mm, CreateDate=8/30/2016, Device=74AHC1G14GW, HelpURL=\\cern.ch\dfs\Applications\Altium\Datasheets\74AHC1G14GW.pdf, LatestRevisionDate=8/30/2016, Manufacturer Part Number=74AHC1G14GW, Mounted=Yes, PackageDescription="SOT353, SC70-5, 0.65mm Pitch; 5 Pin, 1.25mm W X 2.05mm L X 1.10mm H body, IPC Medium Density", Part Description="Inverting Schmitt Trigger", Part Number=74AHC1G14GW, Pin Count=3, PressFit=No, Sense=No, SMD=Yes, Socket=No
J1: library part MOLEX_47272-0001, "Connector Mini DisplayPort 20 Male + 1 Shield", Manufacturer=MOLEX, Manufacturer Part Number=47272-0001, Author="CERN DEM JLC", Component Type=Standard, ComponentHeight=5.63mm, CreateDate=2/5/2015, Family="Display Port", HelpURL=\\cern.ch\dfs\Applications\Altium\Datasheets\MOLEX_47272-0001.pdf, LatestRevisionDate=2/5/2015, Mounted=Yes, Part Description="20 Circuits, 0.50mm Pitch, Right Angle DisplayPort Male Receptacle", Part Number=MOLEX_47272-0001, Pin Count=21, PressFit=No, Sense=No, SMD=Yes, Socket=No, Status=None
J2: "WR-MCX PCB Jack, THT, Right Angle, Solder Leg 1.73mm", Frequency Range=DC~6GHz, Manufacturer="Wurth Elektronik", Operating Temperature Max=155°C, Operating Temperature Min=-55°C, Category="Coaxial Connectors", Center Contact Diameter=0.96mm, ComponentLink1Description="Website Link", ComponentLink1URL=https://www.we-online.com/redexpert/article/60611002111502?ad, ComponentLink2Description="Datasheet Link", ComponentLink2URL=https://www.we-online.com/redexpert/spec/60611002111502?ad, Connector Type=MCX, Gender=Jack, Impedance=50Ω, Interface Type="IEC 61169-36", Manufacturer Part Number=60611002111502, Match Code=WR-MCX, Mount="Through Hole", Orientation="Right Angle", Packaging=Tray
L1 L3: library part IND_6.8UH_20%_COILCRAFT_XAL4030, "Inductor With Core", Manufacturer1=COILCRAFT, Manufacturer1 Part Number=XAL4030-682MEC, Power=3A, Resistance=0.0741R, Tolerance=±20%, Author="CERN DEM MR", Component Type=Standard, ComponentHeight=2.1mm, CreateDate=14.03.2016, HelpURL=\\cern.ch\dfs\Applications\Altium\Datasheets\IND_COILCRAFT_XAL4030.pdf, LatestRevisionDate=14.03.2016, Mounted=Yes, Part Description="SMD Shielded Power Inductor", Part Number=IND_6.8UH_20%_COILCRAFT_XAL4030, Pin Count=2, Sense=No, SMD=Yes, Socket=No, Status=None
L2: library part IND_3.3UH_30%_WURTH_WE-TPC_744043003, "Inductor With Core", Manufacturer1="WURTH ELEKTRONIK", Manufacturer1 Part Number=744043003, Power=2.15A, Resistance=0.03R, Tolerance=±30%, Author="CERN DEM JLC", Component Type=Standard, ComponentHeight=3mm, CreateDate=12.07.2011, HelpURL=\\cern.ch\dfs\Applications\Altium\Datasheets\IND_WURTH_WE-TPC_744043003.pdf, LatestRevisionDate=24.01.2012, Mounted=Yes, Part Description="Shielded Tiny Power Inductor (WE-TPC Serie)", Part Number=IND_3.3UH_30%_WURTH_WE-TPC_744043003, Pin Count=2, Sense=No, SMD=Yes, Socket=No
L4: library part IND0603_MURATA_BLM18SG121TN1D, Case=0603, Manufacturer1=MURATA, Manufacturer1 Part Number=BLM18SG121TN1D, Power=3A, Resistance=0.025R, Tolerance=±25%, Author="CERN DEM JLC", Component Type=Standard, ComponentHeight=0.65mm, CreateDate=23.07.2014, HelpURL=\\cern.ch\dfs\Applications\Altium\Datasheets\IND0603_MURATA_BLM18S.pdf, LatestRevisionDate=25.10.2018, Mounted=Yes, Part Description="SMD EMIFIL Suppression Chip Ferrite Bead", Part Number=IND0603_MURATA_BLM18SG121TN1D, Pin Count=2, Sense=No, SMD=Yes, Socket=No
L5: library part SPM10065VT-1R5M-D, "General Purpose Inductor, 1.5uH, 20%, 1 Element, Metal Composite-Core, SMD, 4139", Current Rating=34.4A, DC Resistance (DCR)=3.41mΩ, Manufacturer=TDK, Manufacturer Lifecycle Status=PRODUCTION, Max Current Rating=20.2A, Max Operating Temperature=155°C, Min Operating Temperature=-55°C, Supplier Part Number=445-SPM10065VT-1R5M-DCT-ND, Test Frequency=100kHz, Tolerance=20%, Category="Fixed Inductors", ComponentLink1Description=https://datasheet.octopart.com:443/SPM10065VT-1R5M-D-TDK-datasheet-181268802.pdf?src-supplier=IHS, ComponentLink1URL=https://datasheet.octopart.com:443/SPM10065VT-1R5M-D-TDK-datasheet-181268802.pdf?src-supplier=IHS, ComponentLink2Description=https://datasheet.octopart.com:443/SPM10065VT-1R5M-D-TDK-datasheet-155380651.pdf?src-supplier=TDK, ComponentLink2URL=https://datasheet.octopart.com:443/SPM10065VT-1R5M-D-TDK-datasheet-155380651.pdf?src-supplier=TDK, Height=6.5mm, Length=10.5mm, Lifecycle Status=Production, Manufacturer Part Number=SPM10065VT-1R5M-D, Max Length=10.9mm, Max Width=10.4mm, Min Length=10.1mm, Min Width=9.6mm, Number of Circuits=1, Number of Terminals=2, Pricing="1=1.19, 10=0.977, 25=0.904, 50=0.8524, 100=0.8036, 250=0.74348 (USD)", REACH SVHC=Yes, RoHS=Compliant, Schedule B="8504500000, 8504500000|8504500000|8504500000|8504500000|8504500000", Stock=659, Supplier=DigiKey, Width=10mm
L6: library part IND_3.3UH_20%_WURTH_WE-PD_744778003, "Inductor With Core", Manufacturer="WURTH ELEKTRONIK", Manufacturer Part Number=744778003, Power=3.1A, Resistance=0.024R, Tolerance=±20%, Author="CERN DEM JLC", Component Type=Standard, ComponentHeight=3.4mm, CreateDate=1/21/2013, HelpURL=\\cern.ch\dfs\Applications\Altium\Datasheets\IND_WURTH_WE-PD_744778003.pdf, LatestRevisionDate=1/21/2013, Mounted=Yes, Part Description="Shielded Power Inductor (WE-PD Series)", Part Number=IND_3.3UH_20%_WURTH_WE-PD_744778003, Pin Count=2, Sense=No, SMD=Yes, Socket=No
L7: library part IND_4.7UH_20%_COILCRAFT_EPL3015, "Inductor", Manufacturer=COILCRAFT, Manufacturer Part Number=EPL3015-472ML, Power=1A, Resistance=0.145R, Tolerance=±20%, Author="CERN DEM BC", Component Type=Standard, ComponentHeight=1.55mm, CreateDate=2/27/2017, HelpURL=\\cern.ch\dfs\Applications\Altium\Datasheets\IND_COILCRAFT_EPL3015.pdf, LatestRevisionDate=2/27/2017, Mounted=Yes, Part Description="Shielded SMD Power Inductor", Part Number=IND_4.7UH_20%_COILCRAFT_EPL3015, Pin Count=2, Sense=No, SMD=Yes, Socket=No
L8 L9 L10: library part IND_33UH_30%_WURTH_WE-TPC_744043330, "Inductor With Core", Manufacturer="WURTH ELEKTRONIK", Manufacturer Part Number=744043330, Power=820mA, Resistance=0.23R, Tolerance=±30%, Author="CERN DEM JLC", Component Type=Standard, ComponentHeight=3mm, CreateDate=11/24/2014, HelpURL=\\cern.ch\dfs\Applications\Altium\Datasheets\IND_WURTH_WE-TPC_744043330.pdf, LatestRevisionDate=11/24/2014, Mounted=Yes, Part Description="Shielded Tiny Power Inductor (WE-TPC Series)", Part Number=IND_33UH_30%_WURTH_WE-TPC_744043330, Pin Count=2, Sense=No, SMD=Yes, Socket=No
LD1 LD2: library part LED_AVAGO_HSMC-C120, "LED Red 1C 2A", Manufacturer="AVAGO TECHNOLOGIES", Manufacturer Part Number=HSMC-C120, Author="CERN DEM JMW", Bonding=No, Color=Red, Component Type=Standard, ComponentHeight=0.7mm, ComponentLink1Description="Design Guide", ComponentLink1URL=\\cern.ch\dfs\Applications\Altium\Datasheets\LED_AVAGO_HSMC-C120_DESIGN-GUIDE.pdf, CreateDate=7/22/2009, HelpURL=\\cern.ch\dfs\Applications\Altium\Datasheets\LED_AVAGO_HSMC-C120.pdf, LatestRevisionDate=6/20/2012, Mounted=Yes, PackageDescription="Red Chip LED, 2-Leads, Body 1.7x1.1mm, Side Emitting Package", Part Description="High Performance Right Angle Chip Red LED", Part Number=LED_AVAGO_HSMC-C120, Pin Count=2, PressFit=No, Sense=No, SMD=Yes, Socket=No, Status="Not Recommended"
P1: "WR-TBL Series 3177 Close Horizontal PCB Header with Flanges, THT, pitch 5mm, 2p", Manufacturer="Wurth Elektronik", Operating Temperature Max=105°C, Operating Temperature Min=-40°C, Rated Current=20A, Working Voltage=300V, Application=Pluggable, Category="Terminal Blocks", ComponentLink1Description="Website Link", ComponentLink1URL=https://www.we-online.com/redexpert/article/691317710002?ad, ComponentLink2Description="Datasheet Link", ComponentLink2URL=https://www.we-online.com/redexpert/spec/691317710002?ad, Manufacturer Part Number=691317710002, Match Code=WR-TBL, Modularity=No, Mount="Through Hole", Number of Pins=2, Number of Rows=1, Orientation=Horizontal, Packaging=Box, Pitch=5mm
P2: "WR-TBL Series 3175 Close Horizontal PCB Header with Flanges, THT, pitch 5.08mm, 2p", Manufacturer="Wurth Elektronik", Operating Temperature Max=105°C, Operating Temperature Min=-40°C, Rated Current=20A, Working Voltage=300V, Application=Pluggable, Category="Terminal Blocks", ComponentLink1Description="Website Link", ComponentLink1URL=https://www.we-online.com/redexpert/article/691317510002?ad, ComponentLink2Description="Datasheet Link", ComponentLink2URL=https://www.we-online.com/redexpert/spec/691317510002?ad, Manufacturer Part Number=691317510002, Match Code=WR-TBL, Modularity=No, Mount="Through Hole", Number of Pins=2, Number of Rows=1, Orientation=Horizontal, Packaging=Box, Pitch=5.08mm
R1 R2 R7 R11 R13 R14 R16 R21 R23 R29 R31 R32 R33 R34 R35 R38 R39 R40 R41 R42 R77 R78 R79 R80 R81 R82 R83 R84 R85 R86 R87 R89 R91 R92 R99 R100 R102 R103 R105 R110: library part R0402_10K_0.1%_0.063W_25PPM, "Resistor - 0.1%", Case=0402, Manufacturer=GENERIC, Manufacturer1 ComponentHeight=0.35mm, Manufacturer1 Example="TE CONNECTIVITY", Manufacturer1 Part Number=CPF0402B10KE1, Power=0.063W, Tolerance=±0.1%, Author="CERN DEM JMW", Component Type=Standard, CreateDate=9/22/2015, HelpURL=\\cern.ch\dfs\Applications\Altium\Datasheets\R0402_TYCO_CPF.pdf, LatestRevisionDate=9/22/2015, Manufacturer Part Number=R0402_10K_0.1%_0.063W_25PPM, Mounted=Yes, Part Description="Thin Film Precision Resistor", Part Number=R0402_10K_0.1%_0.063W_25PPM, Pin Count=2, PressFit=No, Sense=No, SMD=Yes, Socket=No, Status="Not Recommended", TC=±25ppm/°C
R3 R96: library part R0805_12K_0.1%_0.1W_10PPM, "Resistor - 0.1%", Case=0805, Manufacturer=GENERIC, Manufacturer1 ComponentHeight=0.6mm, Manufacturer1 Example="TYCO HOLSWORTHY", Manufacturer1 Part Number=RN73C2A12KBTG, Power=0.1W, Tolerance=±0.1%, Author="CERN DEM JLC", Component Type=Standard, CreateDate=3/25/2014, HelpURL=\\cern.ch\dfs\Applications\Altium\Datasheets\R0805_Tyco_RN73.pdf, LatestRevisionDate=3/25/2014, Manufacturer Part Number=R0805_12K_0.1%_0.1W_10PPM, Mounted=Yes, Part Description="Thin Film Chip Resistor", Part Number=R0805_12K_0.1%_0.1W_10PPM, Pin Count=2, PressFit=No, Sense=No, SMD=Yes, Socket=No, Status="Not Recommended", TC=±10ppm
R4 R10 R18 R19 R37 R44 R45: library part R0603_200R_1%_0.1W_100PPM, "Resistor - 1%", Case=0603, Manufacturer=GENERIC, Manufacturer1=Vishay, Manufacturer1 ComponentHeight=0.55mm, Manufacturer1 Part Number=CRCW0603200RFKEA, Power=0.1W, Tolerance=±1%, Author="CERN DEM JLC", Component Type=Standard, CreateDate=03.12.2007, HelpURL=\\cern.ch\dfs\Applications\Altium\Datasheets\R0603_NIC_NRC.pdf, LatestRevisionDate=13.03.2008, Manufacturer Part Number=R0603_200R_1%_0.1W_100PPM, Mounted=Yes, Part Description="General Purpose Thick Film Chip Resistor", Part Number=R0603_200R_1%_0.1W_100PPM, Pin Count=2, PressFit=No, Sense=No, SMD=Yes, Socket=No, Status=Preferred, TC=±100ppm/°C
R5: library part R_0R01_1%_2W_100PPM_OHMITE_LVK25, "Power and Current Sensing Resistor", Manufacturer=OHMITE, Manufacturer Part Number=LVK25R010FER, Power=2W, Tolerance=±1%, Author="CERN DEM BC", Component Type=Standard, ComponentHeight=0.7mm, CreateDate=9/7/2020, HelpURL=\\cern.ch\dfs\Applications\Altium\Datasheets\R_OHMITE_LVK25.pdf, LatestRevisionDate=9/7/2020, Mounted=Yes, Part Description="Four Terminal High Precision Current Sense", Part Number=R_0R01_1%_2W_100PPM_OHMITE_LVK25, Pin Count=4, PressFit=No, Sense=No, SMD=Yes, Socket=No, Status=None, TC=±100ppm/°C
R6 R25 R30 R57 R94 R95: library part R0603_1K_0.1%_0.063W_10PPM, "Resistor - 0.1%", Case=0603, Manufacturer=GENERIC, Manufacturer1="TYCO HOLSWORTHY", Manufacturer1 ComponentHeight=0.55mm, Manufacturer1 Part Number=RN73C1J1K0BTG, Power=0.063W, Tolerance=±0.1%, Author="CERN DEM BC", Component Type=Standard, CreateDate=23.05.2016, HelpURL=\\cern.ch\dfs\Applications\Altium\Datasheets\R0603_Tyco_RN73.pdf, LatestRevisionDate=23.05.2016, Manufacturer Part Number=R0603_1K_0.1%_0.063W_10PPM, Mounted=Yes, Part Description="Thin Film Chip Resistor", Part Number=R0603_1K_0.1%_0.063W_10PPM, Pin Count=2, PressFit=No, Sense=No, SMD=Yes, Socket=No, Status="Not Recommended", TC=±10ppm
R8: library part R0603_8R2_1%_0.1W_200PPM, "Resistor - 1%", Case=0603, Manufacturer=GENERIC, Manufacturer1="YAGEO PHYCOMP", Manufacturer1 ComponentHeight=0.65mm, Manufacturer1 Part Number=RC0603FR-078R2L, Power=0.1W, Tolerance=±1%, Author="CERN DEM JLC", Component Type=Standard, CreateDate=03/12/2007, HelpURL=\\cern.ch\dfs\Applications\Altium\Datasheets\R0603_Phycomp_RC0603.pdf, LatestRevisionDate=17/10/2012, Manufacturer Part Number=R0603_8R2_1%_0.1W_200PPM, Mounted=Yes, Part Description="General Purpose Thick Film Chip Resistor", Part Number=R0603_8R2_1%_0.1W_200PPM, Pin Count=2, PressFit=No, Sense=No, SMD=Yes, Socket=No, Status=Preferred, TC=±200ppm/°C
R9 R17 R27 R98: library part R0603_51R_1%_0.1W_100PPM, "Resistor - 1%", Case=0603, Manufacturer=GENERIC, Manufacturer1 ComponentHeight=0.55mm, Manufacturer1 Example="NIC COMPONENT", Manufacturer1 Part Number=NRC06F51R0TRF, Power=0.1W, Tolerance=±1%, Author="CERN DEM JLC", Component Type=Standard, CreateDate=12/3/2007, HelpURL=\\cern.ch\dfs\Applications\Altium\Datasheets\R0603_NIC_NRC.pdf, LatestRevisionDate=3/13/2008, Manufacturer Part Number=R0603_51R_1%_0.1W_100PPM, Mounted=Yes, Part Description="General Purpose Thick Film Chip Resistor", Part Number=R0603_51R_1%_0.1W_100PPM, Pin Count=2, PressFit=No, Sense=No, SMD=Yes, Socket=No, Status=Preferred, TC=±100ppm/°C
R12 R70 R76 R108: library part R0402_1K_1%_0.0625W_100PPM, "Resistor - 1%", Case=0402, Manufacturer=GENERIC, Manufacturer1 ComponentHeight=0.4mm, Manufacturer1 Example="YAGEO PHYCOMP", Manufacturer1 Part Number=232270671002L, Power=0.0625W, Tolerance=±1%, Author="CERN DEM JLC", Component Type=Standard, CreateDate=12/3/2007, HelpURL=\\cern.ch\dfs\Applications\Altium\Datasheets\R0402_Phycomp_RC0402.pdf, LatestRevisionDate=10/17/2012, Manufacturer Part Number=R0402_1K_1%_0.0625W_100PPM, Mounted=Yes, Part Description="General Purpose Thick Film Chip Resistor", Part Number=R0402_1K_1%_0.0625W_100PPM, Pin Count=2, PressFit=No, Sense=No, SMD=Yes, Socket=No, Status="Not Recommended", TC=±100ppm/°C
R15 R97: library part R0603_4K02_0.1%_0.063W_10PPM, "Resistor - 0.1%", Case=0603, Manufacturer=GENERIC, Manufacturer1 ComponentHeight=0.5mm, Manufacturer1 Example="TYCO HOLSWORTHY", Manufacturer1 Part Number=RN73C1J4K02BTDF, Power=0.063W, Tolerance=±0.1%, Author="CERN DEM JLC", Component Type=Standard, CreateDate=12/3/2007, HelpURL=\\cern.ch\dfs\Applications\Altium\Datasheets\R0603_Tyco_RN73.pdf, LatestRevisionDate=3/13/2008, Manufacturer Part Number=R0603_4K02_0.1%_0.063W_10PPM, Mounted=Yes, Part Description="Thin Film Chip Resistor", Part Number=R0603_4K02_0.1%_0.063W_10PPM, Pin Count=2, PressFit=No, Sense=No, SMD=Yes, Socket=No, Status="Not Recommended", TC=±10ppm
R20 R22: library part R0402_100R_1%_0.0625W_100PPM, "Resistor - 1%", Case=0402, Manufacturer=GENERIC, Manufacturer1 ComponentHeight=0.4mm, Manufacturer1 Example="YAGEO PHYCOMP", Manufacturer1 Part Number=232270671001L, Power=0.0625W, Tolerance=±1%, Author="CERN DEM JLC", Component Type=Standard, CreateDate=12/3/2007, HelpURL=\\cern.ch\dfs\Applications\Altium\Datasheets\R0402_Phycomp_RC0402.pdf, LatestRevisionDate=10/17/2012, Manufacturer Part Number=R0402_100R_1%_0.0625W_100PPM, Mounted=Yes, Part Description="General Purpose Thick Film Chip Resistor", Part Number=R0402_100R_1%_0.0625W_100PPM, Pin Count=2, PressFit=No, Sense=No, SMD=Yes, Socket=No, Status="Not Recommended", TC=±100ppm/°C
R24: library part R0603_200R_1%_0.1W_100PPM, "Resistor - 1%", Case=0603, Manufacturer=GENERIC, Manufacturer1 ComponentHeight=0.55mm, Manufacturer1 Example="NIC COMPONENT", Manufacturer1 Part Number=NRC06F2000TRF, Power=0.1W, Tolerance=±1%, Author="CERN DEM JLC", Component Type=Standard, CreateDate=12/3/2007, HelpURL=\\cern.ch\dfs\Applications\Altium\Datasheets\R0603_NIC_NRC.pdf, LatestRevisionDate=3/13/2008, Manufacturer Part Number=R0603_200R_1%_0.1W_100PPM, Mounted=Yes, Part Description="General Purpose Thick Film Chip Resistor", Part Number=R0603_200R_1%_0.1W_100PPM, Pin Count=2, PressFit=No, Sense=No, SMD=Yes, Socket=No, Status=Preferred, TC=±100ppm/°C
R26: library part R0603_2K55_0.1%_0.063W_10PPM, "Resistor - 0.1%", Case=0603, Manufacturer=GENERIC, Manufacturer1 ComponentHeight=0.5mm, Manufacturer1 Example="TYCO HOLSWORTHY", Manufacturer1 Part Number=RN73C1J2K55BTDF, Power=0.063W, Tolerance=±0.1%, Author="CERN DEM JLC", Component Type=Standard, CreateDate=12/3/2007, HelpURL=\\cern.ch\dfs\Applications\Altium\Datasheets\R0603_Tyco_RN73.pdf, LatestRevisionDate=3/13/2008, Manufacturer Part Number=R0603_2K55_0.1%_0.063W_10PPM, Mounted=Yes, Part Description="Thin Film Chip Resistor", Part Number=R0603_2K55_0.1%_0.063W_10PPM, Pin Count=2, PressFit=No, Sense=No, SMD=Yes, Socket=No, Status="Not Recommended", TC=±10ppm
R28: library part RCF_10R_10%_2W_-1300±300PPM_OHMITE_OY, "Resistor - 10%", Case="LS30 L22.5 x D8", Manufacturer=OHMITE, Manufacturer Part Number=OY100KE, Power=2W, Tolerance=±10%, Author="CERN DEM MR", Component Type=Standard, ComponentHeight=8mm, CreateDate=5/13/2016, HelpURL=\\cern.ch\dfs\Applications\Altium\Datasheets\RCF_OHMITE_OY.pdf, LatestRevisionDate=5/13/2016, Mounted=Yes, Part Description="Ceramic Composition Resistor - OY Series", Part Number=RCF_10R_10%_2W_-1300±300PPM_OHMITE_OY, Pin Count=2, PressFit=No, Sense=No, SMD=No, Socket=No, Status="Not recommended", TC=-1300±300ppm/°C
R36: library part R1206_15R_1%_0.25W_100PPM, "Resistor - 1%", Case=1206, Manufacturer=GENERIC, Manufacturer1 ComponentHeight=0.65mm, Manufacturer1 Example="NIC COMPONENT", Manufacturer1 Part Number=NRC12F15R0TRF, Power=0.25W, Tolerance=±1%, Author="CERN DEM JLC", Component Type=Standard, CreateDate=12/3/2007, HelpURL=\\cern.ch\dfs\Applications\Altium\Datasheets\R1206_NIC_NRC.pdf, LatestRevisionDate=3/13/2008, Manufacturer Part Number=R1206_15R_1%_0.25W_100PPM, Mounted=Yes, Part Description="General Purpose Thick Film Chip Resistor", Part Number=R1206_15R_1%_0.25W_100PPM, Pin Count=2, PressFit=No, Sense=No, SMD=Yes, Socket=No, Status=Preferred, TC=±100ppm/°C
R43 R93: library part R0402_75R_1%_0.0625W_100PPM, "Resistor - 1%", Case=0402, Manufacturer=GENERIC, Manufacturer1 ComponentHeight=0.4mm, Manufacturer1 Example="YAGEO PHYCOMP", Manufacturer1 Part Number=232270677509L, Power=0.0625W, Tolerance=±1%, Author="CERN DEM JLC", Component Type=Standard, CreateDate=03/12/2007, HelpURL=\\cern.ch\dfs\Applications\Altium\Datasheets\R0402_Phycomp_RC0402.pdf, LatestRevisionDate=17/10/2012, Manufacturer Part Number=R0402_75R_1%_0.0625W_100PPM, Mounted=Yes, Part Description="General Purpose Thick Film Chip Resistor", Part Number=R0402_75R_1%_0.0625W_100PPM, Pin Count=2, PressFit=No, Sense=No, SMD=Yes, Socket=No, Status="Not Recommended", TC=±100ppm/°C
R46: library part R0603_75K_1%_0.1W_100PPM, "Resistor - 1%", Case=0603, Manufacturer=GENERIC, Manufacturer1=Vishay, Manufacturer1 ComponentHeight=0.55mm, Manufacturer1 Part Number=CRCW060375K0FKEAC, Power=0.1W, Tolerance=±1%, Author="CERN DEM JLC", Component Type=Standard, CreateDate=03.12.2007, HelpURL=\\cern.ch\dfs\Applications\Altium\Datasheets\R0603_NIC_NRC.pdf, LatestRevisionDate=13.03.2008, Manufacturer Part Number=R0603_75K_1%_0.1W_100PPM, Mounted=Yes, Part Description="General Purpose Thick Film Chip Resistor", Part Number=R0603_75K_1%_0.1W_100PPM, Pin Count=2, PressFit=No, Sense=No, SMD=Yes, Socket=No, Status=Preferred, TC=±100ppm/°C
R47: library part R0603_24K_1%_0.1W_100PPM, "Resistor - 1%", Case=0603, Manufacturer=GENERIC, Manufacturer1=Vishay, Manufacturer1 ComponentHeight=0.55mm, Manufacturer1 Part Number=CRCW060324K0FKEA, Power=0.1W, Tolerance=±1%, Author="CERN DEM JLC", Component Type=Standard, CreateDate=03.12.2007, HelpURL=\\cern.ch\dfs\Applications\Altium\Datasheets\R0603_NIC_NRC.pdf, LatestRevisionDate=13.03.2008, Manufacturer Part Number=R0603_24K_1%_0.1W_100PPM, Mounted=Yes, Part Description="General Purpose Thick Film Chip Resistor", Part Number=R0603_24K_1%_0.1W_100PPM, Pin Count=2, PressFit=No, Sense=No, SMD=Yes, Socket=No, Status=Preferred, TC=±100ppm/°C
R48: library part R0603_71K5_0.1%_0.063W_10PPM, "Resistor - 0.1%", Case=0603, Manufacturer=GENERIC, Manufacturer1 ComponentHeight=0.5mm, Manufacturer1 Example="TYCO HOLSWORTHY", Manufacturer1 Part Number=RN73C1J71K5BTDF, Power=0.063W, Tolerance=±0.1%, Author="CERN DEM JLC", Component Type=Standard, CreateDate=12/3/2007, HelpURL=\\cern.ch\dfs\Applications\Altium\Datasheets\R0603_Tyco_RN73.pdf, LatestRevisionDate=3/13/2008, Manufacturer Part Number=R0603_71K5_0.1%_0.063W_10PPM, Mounted=Yes, Part Description="Thin Film Chip Resistor", Part Number=R0603_71K5_0.1%_0.063W_10PPM, Pin Count=2, PressFit=No, Sense=No, SMD=Yes, Socket=No, Status="Not Recommended", TC=±10ppm
R49: library part R_0R003_1%_2W_200PPM_OHMITE_LVK25, "Power and Current Sensing Resistor", Manufacturer=OHMITE, Manufacturer Part Number=LVK25R003FER, Power=2W, Tolerance=±1%, Author="CERN DEM HF", Component Type=Standard, ComponentHeight=0.7mm, CreateDate=5/25/2023, HelpURL=\\cern.ch\dfs\Applications\Altium\Datasheets\R_OHMITE_LVK25.pdf, LatestRevisionDate=5/25/2023, Mounted=Yes, Part Description="Four Terminal High Precision Current Sense", Part Number=R_0R003_1%_2W_200PPM_OHMITE_LVK25, Pin Count=4, PressFit=No, Sense=No, SMD=Yes, Socket=No, Status=None, TC=±200ppm/°C
R50 R51: library part R0402_27K_1%_0.0625W_100PPM, "Resistor - 1%", Case=0402, Manufacturer=GENERIC, Manufacturer1 ComponentHeight=0.4mm, Manufacturer1 Example="YAGEO PHYCOMP", Manufacturer1 Part Number=232270672703L, Power=0.0625W, Tolerance=±1%, Author="CERN DEM JLC", Component Type=Standard, CreateDate=12/3/2007, HelpURL=\\cern.ch\dfs\Applications\Altium\Datasheets\R0402_Phycomp_RC0402.pdf, LatestRevisionDate=10/17/2012, Manufacturer Part Number=R0402_27K_1%_0.0625W_100PPM, Mounted=Yes, Part Description="General Purpose Thick Film Chip Resistor", Part Number=R0402_27K_1%_0.0625W_100PPM, Pin Count=2, PressFit=No, Sense=No, SMD=Yes, Socket=No, Status="Not Recommended", TC=±100ppm/°C
R52 R106: library part R0402_3K_1%_0.0625W_100PPM, "Resistor - 1%", Case=0402, Manufacturer=GENERIC, Manufacturer1=Vishay, Manufacturer1 ComponentHeight=0.4mm, Manufacturer1 Part Number=RCS04023K00FKED, Power=0.0625W, Tolerance=±1%, Author="CERN DEM JLC", Component Type=Standard, CreateDate=03.12.2007, HelpURL=\\cern.ch\dfs\Applications\Altium\Datasheets\R0402_Phycomp_RC0402.pdf, LatestRevisionDate=17.10.2012, Manufacturer Part Number=R0402_3K_1%_0.0625W_100PPM, Mounted=Yes, Part Description="General Purpose Thick Film Chip Resistor", Part Number=R0402_3K_1%_0.0625W_100PPM, Pin Count=2, PressFit=No, Sense=No, SMD=Yes, Socket=No, Status="Not Recommended", TC=±100ppm/°C
R53: library part R0603_33K_1%_0.1W_100PPM, "Resistor - 1%", Case=0603, Manufacturer=GENERIC, Manufacturer1=Vishay, Manufacturer1 ComponentHeight=0.55mm, Manufacturer1 Part Number=CRCW06033K30FKEBC, Power=0.1W, Tolerance=±1%, Author="CERN DEM JLC", Component Type=Standard, CreateDate=03.12.2007, HelpURL=\\cern.ch\dfs\Applications\Altium\Datasheets\R0603_NIC_NRC.pdf, LatestRevisionDate=13.03.2008, Manufacturer Part Number=R0603_33K_1%_0.1W_100PPM, Mounted=Yes, Part Description="General Purpose Thick Film Chip Resistor", Part Number=R0603_33K_1%_0.1W_100PPM, Pin Count=2, PressFit=No, Sense=No, SMD=Yes, Socket=No, Status=Preferred, TC=±100ppm/°C
R54 R60 R107: library part R0402_10K_1%_0.0625W_100PPM, "Resistor - 1%", Case=0402, Manufacturer=GENERIC, Manufacturer1=Vishay, Manufacturer1 ComponentHeight=0.4mm, Manufacturer1 Part Number=RCA040210K0FKED, Power=0.0625W, Tolerance=±1%, Author="CERN DEM JLC", Component Type=Standard, CreateDate=03.12.2007, HelpURL=\\cern.ch\dfs\Applications\Altium\Datasheets\R0402_Phycomp_RC0402.pdf, LatestRevisionDate=17.10.2012, Manufacturer Part Number=R0402_10K_1%_0.0625W_100PPM, Mounted=Yes, Part Description="General Purpose Thick Film Chip Resistor", Part Number=R0402_10K_1%_0.0625W_100PPM, Pin Count=2, Sense=No, SMD=Yes, Socket=No, TC=±100ppm/°C
  R54 R107: Status="Not recommended"
  R60: PressFit=No, Status="Not Recommended"